# EAGLE board UDAWA-Aktuator4CH (EAGLE 9.6.2)
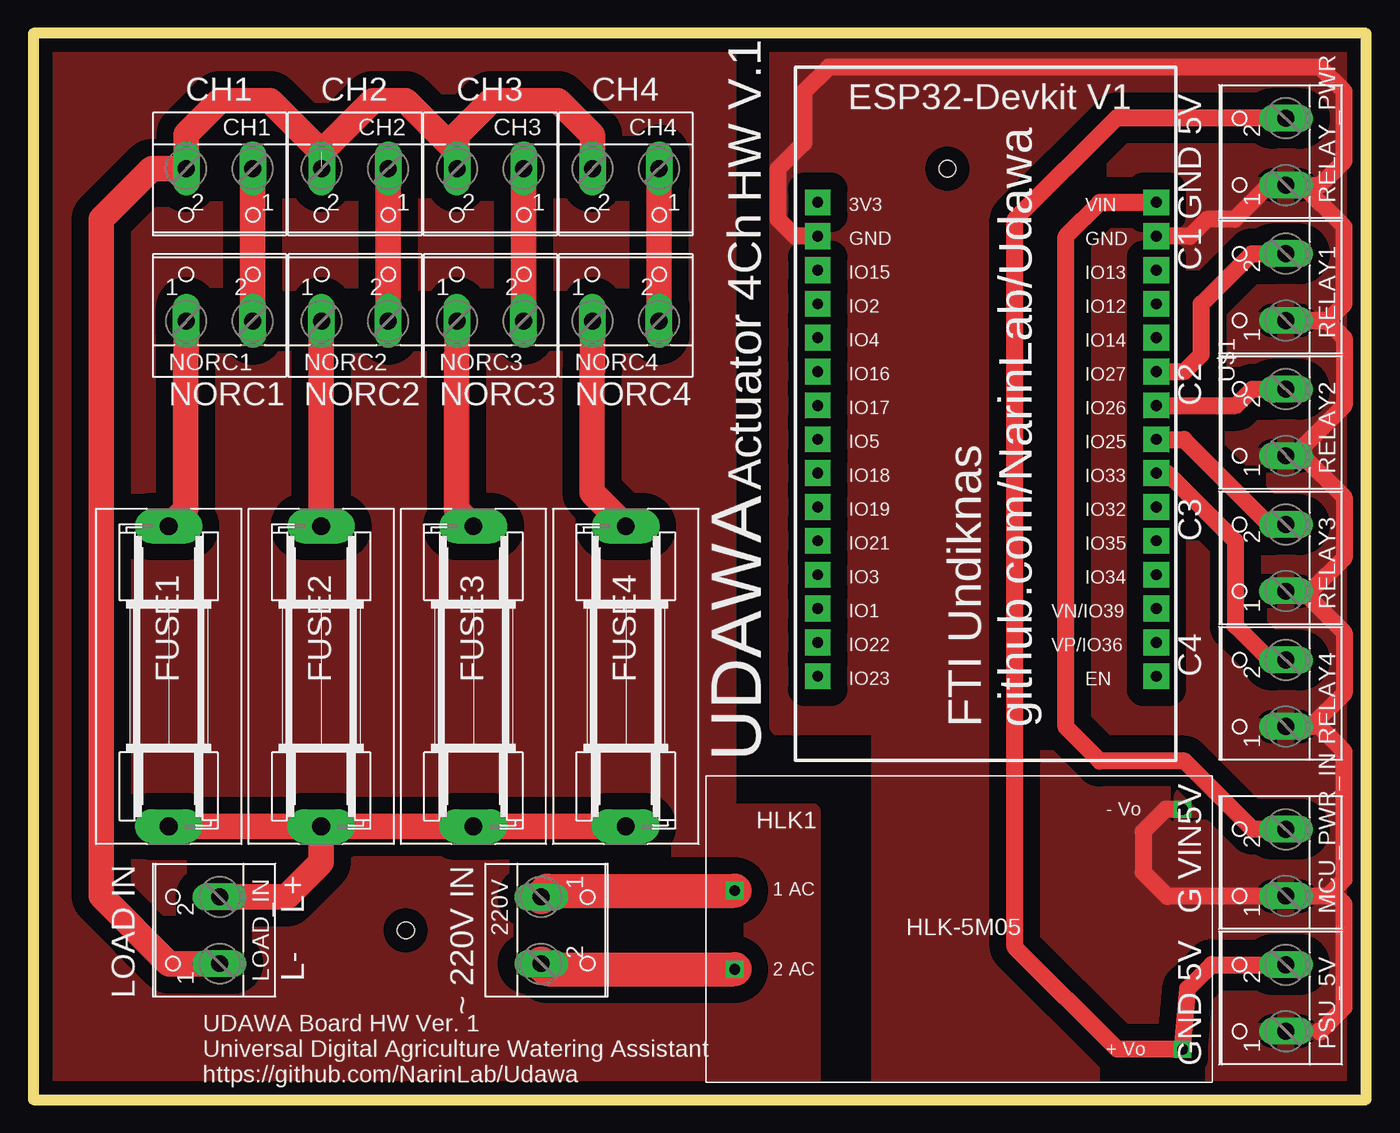
[diagram p0: board, top side]

Size 100 x 80 mm. Coordinates in mm from the lower left corner, seen from the top.
Outline: 0,0 100,0 100,80 0,80 0,0
Copper layers (1*16): Top 0.035mm / dielectric 1.5mm / Bottom 0.035mm
Design rules "default *": minimum track width 6mil, minimum drill 0.35mm, track to track 50mil, track to pad 50mil, pad to pad 50mil, via to via 50mil, smd to smd 30mil, copper to edge 40mil, drill to drill 6mil, minimum pad ring 10mil, minimum via ring 8mil, stop-mask expansion 4mil, vias tented up to drill 0mil, thermal gap 10mil
Holes 1.27 mm at 68.58,69.85 27.94,12.7

## Footprints (pad centres in the part's own frame; a part is rotated, then mirrored left to right if it is on the bottom)
W237-102 = drill 1.27 pad 2.032 long: 1 -2.5,-1.27; 2 2.5,-1.27
SH22,5A = drill 1.321 pad 2.54 long: 1 -11.252,0; 2 11.252,0
HLK-5M05 = drill 0.8 square: 1 -16.85,-2.93; 2 -16.85,2.97; 3 16.75,9.07; 4 16.75,-8.93
ESP32-DEVKITV1 = drill 0.813 pad 1.93 square: 3V3 -16.52,-12.27; D1 13.96,-12.27; D2 -8.9,-12.27; D3 11.42,-12.27; D4 -6.36,-12.27; D5 1.26,-12.27; D12 -8.9,13.135; D13 -11.44,13.135; D14 -6.36,13.135; D15 -11.44,-12.27; D16 -3.82,-12.27; D17 -1.28,-12.27; D18 3.8,-12.27; D19 6.34,-12.27; D21 8.88,-12.27; D22 16.5,-12.27; D23 19.04,-12.27; D25 1.26,13.135; D26 -1.28,13.135; D27 -3.82,13.135; D32 6.34,13.135; D33 3.8,13.135; D34 11.42,13.135; D35 8.88,13.135; D36 16.5,13.135; D39 13.96,13.135; EN 19.04,13.135; GND@1 -13.98,13.135; GND@2 -13.98,-12.27; VIN -16.52,13.135

## Placement (x,y rotation side)
220V  [W237-102]  39.37,12.7 270 top
CH1  [W237-102]  13.97,68.58 180 top
CH2  [W237-102]  24.13,68.58 180 top
CH3  [W237-102]  34.29,68.58 180 top
CH4  [W237-102]  44.45,68.58 180 top
FUSE1  [SH22,5A]  10.16,31.75 270 top
FUSE2  [SH22,5A]  21.59,31.75 270 top
FUSE3  [SH22,5A]  33.02,31.75 270 top
FUSE4  [SH22,5A]  44.45,31.75 270 top
HLK1  5VDC/5W  [HLK-5M05]  69.47,12.7 0 top
LOAD_IN  [W237-102]  12.7,12.7 90 top
MCU_PWR_IN  [W237-102]  92.71,17.78 90 top
NORC1  [W237-102]  13.97,59.69 0 top
NORC2  [W237-102]  24.13,59.69 0 top
NORC3  [W237-102]  34.29,59.69 0 top
NORC4  [W237-102]  44.45,59.69 0 top
PSU_5V  [W237-102]  92.71,7.62 90 top
RELAY1  [W237-102]  92.71,60.96 90 top
RELAY2  [W237-102]  92.71,50.8 90 top
RELAY3  [W237-102]  92.71,40.64 90 top
RELAY4  [W237-102]  92.71,30.48 90 top
RELAY_PWR  [W237-102]  92.71,71.12 90 top
U$1  ESP32DEVKITV1  [ESP32-DEVKITV1]  71.12,50.8 270 top

## Library data of the parts
220V CH1-CH4 LOAD_IN MCU_PWR_IN NORC1-NORC4 PSU_5V RELAY1-RELAY4 RELAY_PWR = con-wago-500; MPN: 237-102; OC_FARNELL: unknown; OC_NEWARK: 70K9898
FUSE1-FUSE4 = fuse; MPN: 0031.7701.11; OC_FARNELL: unknown; OC_NEWARK: 04F1224
HLK1 = HLK-5M05; SIZE: 23x38(mm)
U$1 = ESP32-DEVKITV1

## Nets
3V3: U$1.3V3
5V: HLK1.4 PSU_5V.2 RELAY_PWR.2
AC1: 220V.2 HLK1.1
AC2: 220V.1 HLK1.2
C1: RELAY1.2 U$1.D27
C2: RELAY2.2 U$1.D26
C3: RELAY3.2 U$1.D25
C4: RELAY4.2 U$1.D33
F1: FUSE1.1 NORC1.1
F2: FUSE2.1 NORC2.1
F3: FUSE3.1 NORC3.1
F4: FUSE4.1 NORC4.1
GND: HLK1.3 MCU_PWR_IN.1 PSU_5V.1 RELAY1.1 RELAY2.1 RELAY3.1 RELAY4.1 RELAY_PWR.1 U$1.GND@1 U$1.GND@2
LOAD+: FUSE1.2 FUSE2.2 FUSE3.2 FUSE4.2 LOAD_IN.2
LOAD-: CH1.2 CH2.2 CH3.2 CH4.2 LOAD_IN.1
RC1: CH1.1 NORC1.2
RC2: CH2.1 NORC2.2
RC3: CH3.1 NORC3.2
RC4: CH4.1 NORC4.2
VIN: MCU_PWR_IN.2 U$1.VIN

## Tracks (layer width: path | path; a pad name or v marks a point on that pad's centre or on a via)
5V
  Top 1.27: RELAY_PWR.2 81.32,73.62 81.28,73.66 73.66,66.04 73.66,11.43 81.32,3.77 HLK1.4 86.6,8.32 88.4,10.12 PSU_5V.2
AC1
  Top 2.54: 220V.2 38.53,9.77 HLK1.1
AC2
  Top 2.54: 220V.1 38.57,15.67 HLK1.2
C1
  Top 1.27: U$1.D27 86.37,54.62 87.63,55.88 87.63,59.69 91.4,63.46 RELAY1.2
C2
  Top 1.27: U$1.D26 90.22,52.08 91.44,53.3 RELAY2.2
C3
  Top 1.27: U$1.D25 86.32,49.53 92.71,43.14 RELAY3.2
C4
  Top 1.27: U$1.D33 85.08,47 90.17,41.91 90.17,35.56 92.75,32.98 RELAY4.2
F1
  Top 1.905: FUSE1.1 11.43,44.27 11.43,55.84 11.47,55.88 NORC1.1
F2
  Top 1.905: FUSE2.1 21.59,58.38 NORC2.1
F3
  Top 1.905: NORC3.1 31.79,55.96 31.75,55.92 31.75,44.27 FUSE3.1
F4
  Top 1.905: NORC4.1 41.95,54.69 41.91,54.65 41.91,45.54 FUSE4.1
GND
  Top 1.27: 93.94,15.24 MCU_PWR_IN.1 97.12,15.28 98.35,16.51 98.35,26.11 96.48,27.98 RELAY4.1 95.85,27.98 98.35,30.48 98.35,35.04 95.25,38.14 RELAY3.1 95.85,38.14 98.35,40.64 98.35,45.2 95.25,48.3 RELAY2.1 94.58,48.3 98.35,52.07 98.35,57.15 97.04,58.46 RELAY1.1 97.12,58.46 98.35,59.69 98.35,65.48 95.21,68.62 RELAY_PWR.1 | 93.94,15.24 85.09,15.24 83.28,17.05 83.28,20.1 84.95,21.77 HLK1.3 | U$1.GND@2 57.15,64.77 55.88,66.04 55.88,69.85 57.78,71.75 57.78,75.56 59.69,77.47 96.52,77.47 98.35,75.64 98.35,70.41 96.52,68.58 96.48,68.62 RELAY_PWR.1 | U$1.GND@1 86.8,64.78 88.06,66.05 90.14,66.05 92.71,68.62 RELAY_PWR.1 | 96.48,5.12 96.52,5.08 98.35,6.91 98.35,14.68 97.79,15.24 93.94,15.24
  pour Top: 57.15,80.01 99.06,80.01 99.06,1.27 63.5,0.74 63.5,27.94 55.88,27.94 55.88,78.74
LOAD+
  Top 1.905: LOAD_IN.2 19.01,15.2 21.59,17.78 FUSE2.2 | FUSE1.2 FUSE2.2 | FUSE2.2 FUSE3.2 FUSE4.2
LOAD-  (1 unrouted)
  Top 1.905: CH2.2 21.63,71.08 17.78,74.93 13.97,74.93 11.47,72.43 CH1.2 8.89,69.85 5.08,66.04 5.08,15.28 10.16,10.2 LOAD_IN.1 | 21.63,71.12 25.44,74.93 27.94,74.93 31.79,71.08 CH3.2 31.79,72.39 34.33,74.93 39.37,74.93 41.95,72.35 CH4.2
NCH
  pour Top: 0,80.01 52.07,80.01 52.07,21.59 58.42,21.59 58.42,0 0,0
RC1
  Top 1.905: NORC1.2 CH1.1
RC2
  Top 1.905: NORC2.2 CH2.1
RC3
  Top 1.905: NORC3.2 CH3.1
RC4
  Top 1.905: NORC4.2 CH4.1
VIN
  Top 1.27: MCU_PWR_IN.2 91.48,20.28 86.36,25.4 80.01,25.4 77.47,27.94 77.47,64.77 80.01,67.31 84.25,67.31 U$1.VIN

## Text on the board
tPlace: CH1 | CH2 | CH3 | CH4 | 5V | HW V.1 | GND | C1 | NORC1 | NORC2 | NORC3 | NORC4 | C2 | Actuator 4Ch | C3 | C4 | FTI Undiknas | github.com/NarinLab/Udawa | UDAWA | VIN5V | L+ | G | L- | 5V | LOAD IN | ~ 220V IN | GND | UDAWA Board HW Ver. 1 / Universal Digital Agriculture Watering Assistant / https://github.com/NarinLab/Udawa